# Altium PCB Aptomat_Radio.PcbDoc
Units mm, origin at the board's own origin, x right, y up, seen from the top; angles counter-clockwise.
Board outline 89 x 27 mm, 2 copper layers (Top Layer, Bottom Layer), stack 1.58 mm thick; 39 components, 53 nets, 147 pads, 465 vias.
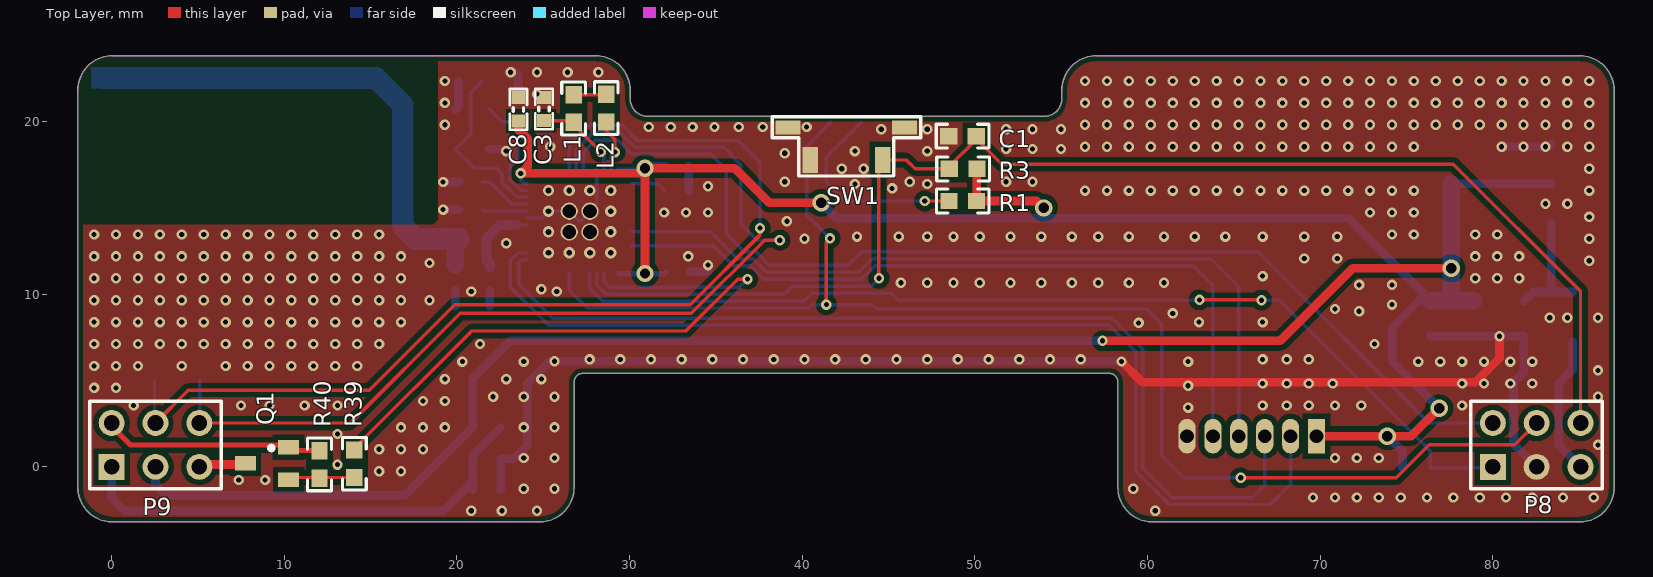
[diagram p0: Top Layer view]
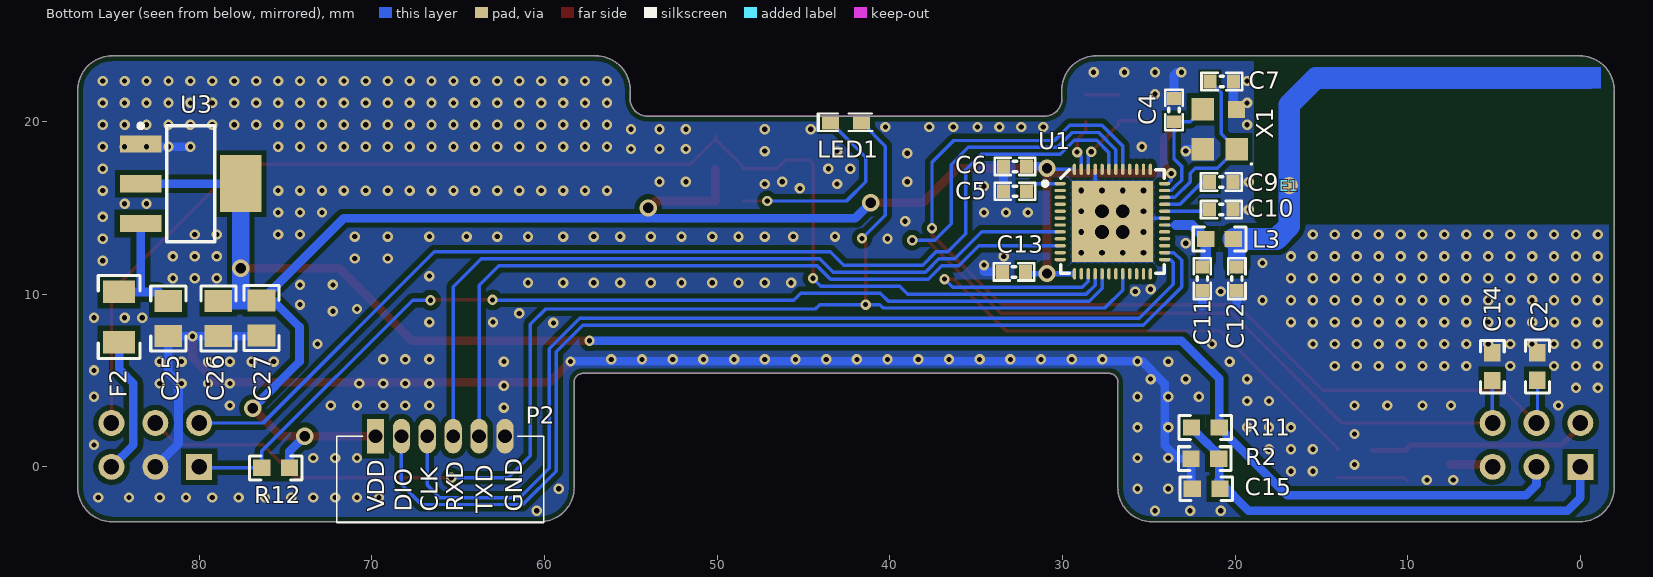
[diagram p1: Bottom Layer view, seen from below]

## Layer stack, top to bottom
Top Solder: solder mask 0.0102, Solder Resist, Dk 3.5
Top Layer: signal copper 0.0356
Dielectric 1: dielectric 1.5086, FR-4, Dk 4.8
Bottom Layer: signal copper 0.0356
Bottom Solder: solder mask 0.0102, Solder Resist, Dk 3.5

## Board outline
0.04,-3.19 cw(c0.04,-1.19) -1.96,-1.19 -1.96,21.81 cw(c0.04,21.81) 0.04,23.81 28.04,23.81 cw(c28.04,21.81) 30.04,21.81 30.04,21.31 ccw(c31.04,21.31) 31.04,20.31 54.04,20.31 ccw(c54.04,21.31) 55.04,21.31 55.04,21.81 cw(c57.04,21.81) 57.04,23.81 85.04,23.81 cw(c85.04,21.81) 87.04,21.81 87.04,-1.19 cw(c85.04,-1.19) 85.04,-3.19 60.29,-3.19 cw(c60.29,-1.19) 58.29,-1.19 58.29,4.91 ccw(c57.79,4.91) 57.79,5.41 27.29,5.41 ccw(c27.29,4.91) 26.79,4.91 26.79,-1.19 cw(c24.79,-1.19) 24.79,-3.19

## Design rules (kind name [scope] priority, off if disabled: settings)
Clearance polygon [IsRegion] p1: gap=0.3
Clearance [All] p2: gap=0.2
MinimumSolderMaskSliver [All] p1: minsoldermaskwidth=0.1
PolygonConnect [All] p1: connectstyle=Direct reliefconductorwidth=0.254 reliefentries=4 polygonreliefangle="90 Angle" airgapwidth=0.254
RoutingVias [All] p1: holewidth=0.3 width=0.6 viastyle="Through Hole" minholewidth=0.3 minwidth=0.6 maxholewidth=5 maxwidth=5
SilkToSilkClearance [All] p1: silktosilkclearance=0.1
SilkToSolderMaskClearance [IsPad] p1: minsilkscreentomaskgap=0.01 clearancetoexposedcopper=TRUE
SolderMaskExpansion [All] p1: expansion=0.102
Width [All] p1: maxlimit=5 minlimit=0.127 preferedwidth=0.254
27 further rules are at their usual default settings.

## Components (designator, comment, footprint, x,y, rotation, side; value= is the part's Value field where it differs from the comment)
C1 "221" 0603 49.29,19.151 r0 top
C2 "102" 0603 2.488,5.812 r270 bottom
C3 "1.0µF" CAPC1608X06L 25.045,20.728 r270 top
C4 "12pF" CAPC1608X06L 23.538,20.666 r90 bottom
C5 "100nF" CAPC1608X06L 32.746,15.966 r0 bottom
C6 "4.7µF" CAPC1608X06L 32.746,17.404 r0 bottom
C7 "12pF" CAPC1608X06L 20.771,22.325 r180 bottom
C8 "100nF" CAPC1608X06L 23.559,20.71 r90 top
C9 "100pF" CAPC1608X06L 20.8,16.5 r180 bottom
C10 "N.C." CAPC1608X06L 20.8,14.9 r180 bottom
C11 "0.8pF" CAPC1608X06L 21.9,10.9 r90 bottom
C12 "1.2pF" CAPC1608X06L 19.9,10.9 r270 bottom
C13 "100nF" CAPC1608X06L 32.807,11.295 r0 bottom
C14 "102" 0603 5.101,5.805 r270 bottom
C15 "104" 0603 21.679,-1.27 r180 bottom
C25 "105" 0805_HV 81.8,8.584 r90 bottom
C26 "105" 0805_HV 78.9,8.6 r90 bottom
C27 "105" 0805_HV 76.4,8.616 r90 bottom
E1 "Antenna" nrfant 16.863,16.287 r180 bottom locked
F2 "Res" 1206 84.646,8.68 r90 bottom
L1 "15nH" 0603 26.767,20.758 r90 top
L2 "10µH" 0603 28.649,20.782 r270 top
L3 "3.9nH" 0603 20.9,13.2 r180 bottom
LED1 "L0603G" LED_0603N 42.538,19.959 r180 bottom locked
P2 "Header 6" CON6P-ZH1.5 69.795,1.777 r180 bottom
P8 "Header 3X2" HDR2X3 80.01,0 r0 top locked
P9 "Header 3X2" HDR2X3 0,0 r0 top locked
Q1 "C1815" SOT23B 9,0.2 r270 top
R1 "220R" 0603 49.3,15.4 r0 top
R2 "2K" 0603 21.75,0.472 r0 bottom
R3 "100k" 0603 49.322,17.258 r0 top
R11 "2K" 0603 21.721,2.281 r0 bottom
R12 "100k" 0603 75.581,-0.06 r180 bottom
R39 "1K" 0603 14.057,0.181 r90 top
R40 "10K" 0603 12.039,0.138 r90 top
SW1 "PB SW" TL3330AF260QG 42.627,18.637 r180 top locked
U1 "nRF52832-QFAA" QFN40P600X600X90-48N 27.106,14.209 r180 bottom locked
U3 "AMS1117-3.3V SOT223 _MH" SOT223 80.5,16.4 r270 bottom
X1 "CX3225SB32000D0FFFCC" SON230P260X60-4N 20.901,19.556 r0 bottom

## Footprints (in the part's own frame and the unit in brackets; to place one, negate y for a bottom-side part, rotate by r counter-clockwise, add the part's x,y. Pads: shape width x height; smd on the part's side, far side on the other; paste and mask are expansions set on the pad)
0603 [mm] "0603 from SM-752 data"
  rect 1x0.95 smd: 1(-0.8,0) 2(0.8,0)
  silkscreen extent -1.52,-0.69 1.52,0.69, body extent -0.87,-0.47 0.87,0.47, height 1
0805_HV [mil] "0805 with 30mil clearance between pads"
  rect 50x63 smd: 1(-40,0) 2(40,0)
  silkscreen extent -74,-40 74,40, body extent -43,-29 43,29, height 57
1206 [mm] "1206 from SM-752 data"
  rect 1.3x1.85 smd: 1(1.45,0) 2(-1.45,0)
  silkscreen extent -2.4,-1.21 2.4,1.21, body extent -1.7,-0.9 1.7,0.9, height 1.35
CAPC1608X06L [mm]
  rect 0.75x0.8 smd: 1(-0.675,0) 2(0.675,0)
  silkscreen extent -1.17,-0.5 1.17,0.5, body extent -0.8,-0.43 0.8,0.43, height 0.8
CON6P-ZH1.5 [mm] "CON6"
  rect 1x2 hole 0.8 paste+0: 1(0,0)
  oval 1x2 hole 0.8 paste+0: 2(1.5,0) 3(3,0) 4(4.5,0) 5(6,0) 6(7.5,0)
  silkscreen extent -2.25,-5 9.75,0
HDR2X3 [mm] "Connector; Header; 3x2 Position"
  rect 1.5x1.5 hole 0.9: 1(0,0)
  round 1.5 hole 0.9: 2(0,2.54) 3(2.54,0) 4(2.54,2.54) 5(5.08,0) 6(5.08,2.54)
  silkscreen extent -1.27,-1.27 6.35,3.81
LED_0603N [mm] "SMD Super Bright LED, GREEN"
  rect 1x0.813 smd: 1(0.9,0) 2(-0.9,0)
  silkscreen extent -1.65,-0.53 1.52,0.51, body extent -0.78,-0.31 0.82,0.89, height 0.3
nrfant [mm]
  round 1 smd: 1(0,0)
  Top Layer region: 17.286,5.617 17.286,6.887 18.048,6.887 18.048,5.617
  Top Layer lines w1.27: 17.401,6.248 1.559,6.248 ; 0,0 0,4.689 ; 1.559,6.248 1.559,6.248 ; 1.559,6.248 0,4.689 ; 0,4.689 0,4.689
QFN40P600X600X90-48N [mm]
  oval 0.65x0.2 smd: 1(-3.025,2.2) 2(-3.025,1.8) 3(-3.025,1.4) 4(-3.025,1) 5(-3.025,0.6) 6(-3.025,0.2) 7(-3.025,-0.2) 8(-3.025,-0.6) 9(-3.025,-1) 10(-3.025,-1.4) 11(-3.025,-1.8) 12(-3.025,-2.2) 25(3.025,-2.2) 26(3.025,-1.8) 27(3.025,-1.4) 28(3.025,-1) 29(3.025,-0.6) 30(3.025,-0.2) 31(3.025,0.2) 32(3.025,0.6) 33(3.025,1) 34(3.025,1.4) 35(3.025,1.8) 36(3.025,2.2)
  oval 0.2x0.65 smd: 13(-2.2,-3.025) 14(-1.8,-3.025) 15(-1.4,-3.025) 16(-1,-3.025) 17(-0.6,-3.025) 18(-0.2,-3.025) 19(0.2,-3.025) 20(0.6,-3.025) 21(1,-3.025) 22(1.4,-3.025) 23(1.8,-3.025) 24(2.2,-3.025) 37(2.2,3.025) 38(1.8,3.025) 39(1.4,3.025) 40(1,3.025) 41(0.6,3.025) 42(0.2,3.025) 43(-0.2,3.025) 44(-0.6,3.025) 45(-1,3.025) 46(-1.4,3.025) 47(-1.8,3.025) 48(-2.2,3.025)
  rect 4.7x4.7 smd: 49(0,0)
  silkscreen extent -4.03,-3 3,3, body extent -3.02,-3.02 3.02,3.02, height 0.86
SON230P260X60-4N [mm] "SON, 4-Leads, Body 3.25x2.55mm, Pitch 2.30mm, IPC Medium Density"
  rect 1.3x1.3 smd: 1(-0.985,1.15) 3(0.985,-1.15) 4(0.985,1.15)
  rect 1x1 smd: 2(-0.985,-1.15)
  silkscreen extent -1.9,1.96 -1.8,2.06, body extent -1.3,-1.65 1.3,1.65, height 0.6
SOT23B [mm] "SOT 23B"
  rect 0.85x1.2 smd: 1(0.95,1.25) 2(0,-1.25) 3(-0.94,1.245)
  silkscreen extent -1.02,0.13 -0.77,0.38, body extent -1.5,-1.2 1.5,1.3, height 1.06
SOT223 [mm]
  rect 1x2.4 smd: 1(-2.3,-2.9) 2(0,-2.9) 3(2.3,-2.9)
  rect 3.3x2.4 smd: 4(0,2.9)
  silkscreen extent -3.47,-3.03 3.35,1.4, body extent -3.25,-3.56 3.25,3.4, height 1.68
TL3330AF260QG [mm]
  rect 1.45x0.8 smd: 1(-3.302,-1.016) 1(3.444,-1.016)
  rect 0.9x1.5 smd: 1(2.167,0.864) 2(-2.035,0.864)
  silkscreen extent -4.23,-1.65 4.37,1.79, body extent -3.83,-2.18 3.97,1.33, height 3.41

## Part data
C1 C2 C14 C15 C25 C26 C27: library part CM, "Cap SMD"
C3: library part C0603-1µ0, "Capacitor, X7R, ±10%"
C4 C7: library part C0402-12p, "Capacitor, NP0, ±2%"
C5 C8 C13: library part C0402-100n, "Capacitor, X7R, ±10%"
C6: library part C0603-4µ7, "Capacitor, X5R, ±10%"
C9: library part C0402-100p, "Capacitor, NP0, ±5%"
C10: library part C0402-N.C., "Not mounted"
C11: library part C0402-0.8p, "Capacitor, NP0, ±5%"
C12: library part C0402-1.2p, "Capacitor, NP0, ±0.1pF"
E1: "Generic Antenna"
F2: library part Res-SMD, "Resistor"
L1: library part L0402-15n, "Inductor, 320mA, ±5%"
L2: library part L0603-10µ, "Inductor, 80mA, ±10%"
L3: library part L0402-3n9, "Inductor, 170mA, ±0.1nH"
LED1: library part "LG L29K Smartled Green", "LED SMARTLED GREEN 570NM 0603"
P2: "Header, 6-Pin"
P8 P9: "Header, 3-Pin, Dual row"
Q1: "NPN 600mW, ECB"
R1: library part R0402-220, "Resistor, ±1%, 0.063W"
R2 R11 R39 R40: library part R, "Resistor 1/4W"
R3 R12: library part R0402-100k, "Resistor, ±1%, 0.063W"
SW1: library part Switch-PB-6.2x6.3mm-SMD, "Tactile Switch, SPNO, SMD, 160gf, 6.2x6.3x2.5mm"
U1: "Multi-protocol Bluetooth Low Energy and 2.4GHz proprietary system-on-chip"
X1: library part XTAL_SMD2016_32MHz_8pF_Epson, "XTAL SMD 2016, 32MHz, Cl=8pF, Tol: ±10ppm, Stab: ±10ppm"

## Free pads (board coordinates)
  round 1 hole 0.8 paste+0: 2(26.506,14.809) 3(27.706,14.809) 4(26.506,13.609) 5(27.706,13.609)

## Via types
v1: diameter 0.6, hole 0.3, Top Layer to Bottom Layer, tented both sides, 442 vias
v2: diameter 0.66, hole 0.33, Top Layer to Bottom Layer, tented both sides, 16 vias
v3: diameter 1, hole 0.6, Top Layer to Bottom Layer, tented both sides, 7 vias

## Nets (pads, with @x,y where several pads share a name; then routed paths per layer and width w, separated by ;. In a path a pad name is that pad's centre, name@x,y a point inside that pad or via, vN(x,y) a via of type N, cw(c..) or ccw(c..) an arc to the next point about the centre after c; other vN are vias at no path point)
ANT: C12.1 E1.1 L3.2 | length 7.4
  Bottom Layer w1: C12.1@19.9,11.7 L3.2@19.9,13
  Bottom Layer w1.27: E1.1 16.863,13.937 17.6,13.2 19.7,13.2 19.9,13 L3.2
BUTTON1: C1.2 P8.6 R3.1 SW1.2 U1.16 | length 77.4
  Top Layer w0.2: v1(44.45,10.922) 44.45,17.563 SW1.2 46.026,17.774 46.542,17.258 R3.1 48.522,17.407 49.986,18.871 C1.2@50.09,18.871 ; C1.2 50.09,18.998 51.562,17.526 77.724,17.526 85.09,10.16 P8.6
  Bottom Layer w0.2: U1.16 28.106,10.529 28.635,10 38.956,10 39.423,10.467 43.995,10.467 v1(44.45,10.922)
CURRENT_SIGNAL1: C14.2 P9.6 U1.42 | length 58.4
  Top Layer w0.2: P9.6 13.836,2.54 20.186,8.89 33.586,8.89 37.826,13.13 v1(38.702,13.13)
  Bottom Layer w0.2: P9.6 5.101,2.561 C14.2 ; U1.42 26.906,18.367 27.907,19.368 29.43,19.368 30.294,18.504 35.448,18.504 36.447,17.505 36.447,14.092 37.409,13.13 v1(38.702,13.13)
CURRENT_SIGNAL2: C2.2 P9.4 U1.41 | length 60
  Top Layer w0.2: P9.4 4.445,4.445 14.923,4.445 19.876,9.398 33.528,9.398 37.559,13.429 v1(37.559,13.829)
  Bottom Layer w0.2: C2.2@2.482,5.024 2.482,2.598 P9.4 ; U1.41 26.506,18.588 27.711,19.792 29.572,19.792 30.46,18.904 36.292,18.904 37.559,17.637 v1(37.559,13.829)
CURRENT_SIGNAL3: U1.40
DEC1: C5.1 U1.1 | length 2.1
  Bottom Layer w0.2: U1.1 31.628,16.409 C5.1
DEC2: C10.1 U1.32 | length 2.6
  Bottom Layer w0.2: C10.1 21.566,14.809 U1.32
DEC3: C9.1 U1.33 | length 3.1
  Bottom Layer w0.2: C9.1 21.9,16.5 23.191,15.209 U1.33
DEC4: C3.2 L1.1 U1.46 | length 5.2
  Top Layer w0.2: C3.2 26.672,20.053 L1.1 26.767,19.817 v1(28.332,18.252)
  Bottom Layer w0.2: v1(28.332,18.252) 28.506,18.078 U1.46
GND: C1.1 C2.1 C3.1 C4.2 C5.2 C6.2 C7.2 C8.2 C9.2 C10.2 C11.1 C12.2 C13.2 C14.1 C15.1 C25.1 C26.1 C27.1 P2.6 P8.3 pad.2 pad.3 pad.4 pad.5 R2.2 SW1.1 U1.31 U1.45 U1.49 U3.1 X1.2 X1.4 | length 101.4
  Top Layer w0.5: v1(58.5,6.1) 59.7,4.9 68.072,4.9 79,4.9 80.4,6.3 v1(80.4,7.568)
  Bottom Layer w0.2: U1.31 24.906,14.409 v2(25.306,14.809) v2(26.506,14.809) U1.49 v2(27.706,14.809) 28.106,15.209 U1.45
  Bottom Layer w0.5: v1(19.2,14.9) C10.2 ; v1(19.2,16.5) C9.2 ; 19.9,9.3 C12.2 ; X1.2 20.096,20.886 C7.2 ; X1.4 22.894,18.406 22.775,18.288 v1(22.86,18.288) ; 21.9,9.3 C11.1 ; C15.1@22.524,-1.313 22.55,-1.287 R2.2 23.291,0.472 24.085,1.266 24.085,4.818 25.382,6.115 v1(25.654,6.115) 31.242,6.115 40.132,6.115 45.466,6.115 50.8,6.115 54.356,6.115 v1@58.5,6.115 ; v1(23.114,22.86) 23.368,22.86 23.538,22.69 C4.2 ; C5.2 33.421,16.679 33.4,16.7 33.421,16.721 C6.2 ; C13.2 34.495,11.295 34.544,11.344 v1(34.544,11.684) ; C27.1 76.432,7.568 v1(80.4,7.568) C25.1 81.8,5.473 81.21,4.883 81.21,1.34 P8.3 ; v1(80.518,18.542) v1(81.788,18.542) v1(83.058,18.542) 83.242,18.542 U3.1
  other v1: 20.828,-2.54 22.606,-2.54 24.638,-2.54 60.452,-2.54 69.596,-1.778 70.866,-1.778 72.136,-1.778 73.406,-1.778 74.676,-1.778 76.2,-1.778 77.724,-1.778 79.248,-1.778 80.772,-1.778 82.296,-1.778 84.074,-1.778 85.852,-1.778 23.876,-1.27 25.654,-1.27 59.182,-1.27 7.366,-0.762 8.89,-0.762 15.494,-0.254 16.764,-0.254 13.081,0.127 23.876,0.508 25.654,0.508 70.866,0.508 72.136,0.508 73.406,0.508 15.494,1.016 16.764,1.016 18.034,1.016 86.106,1.27 13.081,1.905 16.764,2.286 18.034,2.286 19.304,2.286 23.876,2.286 25.654,2.286 62.357,3.429 1.27,3.556 7.493,3.556 9.144,3.556 11.176,3.556 13.081,3.556 66.675,3.556 68.072,3.556 69.342,3.556 70.866,3.556 72.39,3.556 78.232,3.556 18.034,3.81 19.304,3.81 22.098,4.064 23.876,4.064 25.654,4.064 86.106,4.064 -1.016,4.572 0.254,4.572 62.357,4.699 66.675,4.826 68.072,4.826 69.342,4.826 70.739,4.826 78.232,4.826 79.502,4.826 81.026,4.826 82.296,4.826 19.304,5.08 22.86,5.08 24.892,5.08 86.106,5.588 -1.016,5.842 0.254,5.842 1.524,5.842 4.064,5.842 6.604,5.842 7.874,5.842 9.144,5.842 10.414,5.842 11.684,5.842 12.954,5.842 14.224,5.842 20.32,6.096 23.876,6.096 62.357,6.096 75.692,6.096 76.962,6.096 78.232,6.096 79.502,6.096 81.026,6.096 82.296,6.096 27.686,6.223 29.464,6.223 31.242,6.223 33.02,6.223 34.798,6.223 36.576,6.223 38.354,6.223 40.132,6.223 41.91,6.223 43.688,6.223 45.466,6.223 47.244,6.223 49.022,6.223 50.8,6.223 52.578,6.223 54.356,6.223 56.134,6.223 66.675,6.223 68.072,6.223 69.342,6.223 -1.016,7.112 0.254,7.112 1.524,7.112 2.794,7.112 4.064,7.112 5.334,7.112 6.604,7.112 7.874,7.112 9.144,7.112 10.414,7.112 11.684,7.112 12.954,7.112 14.224,7.112 15.494,7.112 21.336,7.112 73.152,7.112 59.489,8.337 -1.016,8.382 0.254,8.382 1.524,8.382 2.794,8.382 4.064,8.382 5.334,8.382 6.604,8.382 7.874,8.382 9.144,8.382 10.414,8.382 11.684,8.382 12.954,8.382 14.224,8.382 15.494,8.382 16.764,8.382 62.992,8.382 66.675,8.382 83.312,8.636 84.328,8.636 86.106,8.636 61.468,8.89 72.263,9.017 70.866,9.144 74.168,9.398 -1.016,9.652 0.254,9.652 1.524,9.652 2.794,9.652 4.064,9.652 5.334,9.652 6.604,9.652 7.874,9.652 9.144,9.652 10.414,9.652 11.684,9.652 12.954,9.652 14.224,9.652 15.494,9.652 16.764,9.652 18.415,9.652 20.828,10.16 25.781,10.16 24.892,10.287 72.263,10.541 74.168,10.541 45.72,10.668 47.244,10.668 48.768,10.668 50.292,10.668 52.07,10.668 53.848,10.668 55.626,10.668 57.15,10.668 58.928,10.668 60.96,10.668 -1.016,10.922 0.254,10.922 1.524,10.922 2.794,10.922 4.064,10.922 5.334,10.922 6.604,10.922 7.874,10.922 9.144,10.922 10.414,10.922 11.684,10.922 12.954,10.922 14.224,10.922 15.494,10.922 16.764,10.922 78.994,10.922 80.264,10.922 81.534,10.922 66.675,11.049 18.415,11.811 85.598,11.938 69.088,12.065 70.993,12.065 -1.016,12.192 0.254,12.192 1.524,12.192 2.794,12.192 4.064,12.192 5.334,12.192 6.604,12.192 7.874,12.192 9.144,12.192 10.414,12.192 11.684,12.192 12.954,12.192 14.224,12.192 15.494,12.192 16.764,12.192 33.401,12.192 78.994,12.192 80.264,12.192 81.534,12.192 22.86,12.954 40.132,13.208 85.598,13.208 43.18,13.335 45.593,13.335 47.244,13.335 48.768,13.335 50.292,13.335 52.07,13.335 53.848,13.335 55.626,13.335 57.15,13.335 58.928,13.335 60.96,13.335 62.738,13.335 64.516,13.335 66.675,13.335 69.088,13.335 70.993,13.335 -1.016,13.462 0.254,13.462 1.524,13.462 2.794,13.462 4.064,13.462 5.334,13.462 6.604,13.462 7.874,13.462 9.144,13.462 10.414,13.462 11.684,13.462 12.954,13.462 14.224,13.462 15.494,13.462 74.168,13.462 75.438,13.462 78.994,13.462 80.264,13.462 39.116,14.224 85.598,14.478 32.004,14.732 33.274,14.732 34.544,14.732 72.898,14.732 74.168,14.732 75.438,14.732 83.058,15.24 84.328,15.24 56.388,16.002 57.658,16.002 58.928,16.002 60.198,16.002 61.468,16.002 62.738,16.002 64.008,16.002 65.278,16.002 66.548,16.002 67.818,16.002 69.088,16.002 70.358,16.002 71.628,16.002 72.898,16.002 74.168,16.002 75.438,16.002 85.598,16.002 45.212,16.129 34.544,16.256 43.053,16.383 47.244,16.383 38.989,16.51 46.228,16.51 51.816,16.51 53.34,16.51 42.291,17.272 43.561,17.272 85.598,17.272 38.989,18.161 43.053,18.288 47.244,18.288 51.816,18.415 53.34,18.415 54.991,18.415 25.4,18.542 56.388,18.542 57.658,18.542 58.928,18.542 60.198,18.542 61.468,18.542 62.738,18.542 64.008,18.542 65.278,18.542 66.548,18.542 67.818,18.542 69.088,18.542 70.358,18.542 71.628,18.542 72.898,18.542 74.168,18.542 75.438,18.542 84.328,18.542 85.598,18.542 44.577,19.558 47.244,19.558 51.816,19.558 53.34,19.558 54.991,19.558 31.115,19.685 32.385,19.685 33.655,19.685 34.925,19.685 36.322,19.685 37.719,19.685 40.259,19.685 19.304,19.812 56.388,19.812 57.658,19.812 58.928,19.812 60.198,19.812 61.468,19.812 62.738,19.812 64.008,19.812 65.278,19.812 66.548,19.812 67.818,19.812 69.088,19.812 70.358,19.812 71.628,19.812 72.898,19.812 74.168,19.812 75.438,19.812 76.708,19.812 77.978,19.812 79.248,19.812 80.518,19.812 81.788,19.812 83.058,19.812 84.328,19.812 85.598,19.812 19.304,21.082 56.388,21.082 57.658,21.082 58.928,21.082 60.198,21.082 61.468,21.082 62.738,21.082 64.008,21.082 65.278,21.082 66.548,21.082 67.818,21.082 69.088,21.082 70.358,21.082 71.628,21.082 72.898,21.082 74.168,21.082 75.438,21.082 76.708,21.082 77.978,21.082 79.248,21.082 80.518,21.082 81.788,21.082 83.058,21.082 84.328,21.082 85.598,21.082 24.638,21.59 19.304,22.352 56.388,22.352 57.658,22.352 58.928,22.352 60.198,22.352 61.468,22.352 62.738,22.352 64.008,22.352 65.278,22.352 66.548,22.352 67.818,22.352 69.088,22.352 70.358,22.352 71.628,22.352 72.898,22.352 74.168,22.352 75.438,22.352 76.708,22.352 77.978,22.352 79.248,22.352 80.518,22.352 81.788,22.352 83.058,22.352 84.328,22.352 85.598,22.352 24.638,22.86 26.416,22.86 28.194,22.86
  other v2: 25.306,12.409 26.506,12.409 27.706,12.409 28.906,12.409 25.306,13.609 26.506,13.609 27.706,13.609 28.906,13.609 28.906,14.809 25.306,16.009 26.506,16.009 27.706,16.009 28.906,16.009
GND_RL: P9.2 Q1.3 R40.2 | length 12.8
  Top Layer w0.3: P9.2 0,2.36 1.098,1.261 9.833,1.261 10.157,0.938 R40.2
  Bottom Layer w0.3: P9.2@0,2.529 P9.2
LED1: LED1.1 P8.4 U1.20 | length 79.2
  Top Layer w0.2: v1(41.402,9.398) 41.402,13.018 v1@41.607,13.223 ; v1(65.405,-0.635) 74.422,-0.635 76.327,1.27 81.28,1.27 P8.4
  Bottom Layer w0.2: U1.20 26.506,10.236 27.542,9.2 40.386,9.2 40.584,9.398 v1(41.402,9.398) 44.069,9.398 44.323,9.144 59.944,9.144 60.833,8.255 60.833,0.635 62.103,-0.635 v1(65.405,-0.635) ; v1(41.61,13.235) 40.259,14.586 40.259,18.58 LED1.1
NetC11_2: C11.2 L3.1 U1.30 | length 4.4
  Bottom Layer w0.2: 23.4,14.009 U1.30
  Bottom Layer w0.6: C11.2 21.9,11.8 21.7,12 L3.1 22.509,14.009 23.4,14.009
NetC25_2: C25.2 F2.1 U3.3 | length 7
  Bottom Layer w0.5: C25.2 82.33,10.13 83.4,10.13 ; U3.3 83.4,10.13 ; F2.1 83.4,10.13
NetL1_2: L1.2 L2.1 | length 1.9
  Top Layer w0.2: L1.2 28.625,21.558 L2.1
NetL2_2: L2.2 U1.47 | length 3.1
  Top Layer w0.2: L2.2 28.649,19.474 29.151,18.972 v1(29.151,18.233)
  Bottom Layer w0.2: U1.47 28.906,17.977 29.151,18.222 v1(29.151,18.233)
NetLED1_2: LED1.2 R1.1 | length 11.8
  Top Layer w0.2: v1(47.1,15.4) R1.1
  Bottom Layer w0.2: LED1.2 41.402,17.923 41.402,16.51 42.512,15.4 v1(47.1,15.4)
NetQ1_1: Q1.1 R39.1 R40.1 | length 4.1
  Top Layer w0.2: Q1.1@10.024,-0.814 10.219,-0.619 R39.1
P0.00: U1.2
P0.01: U1.3
P0.02: U1.4
P0.03: U1.5
P0.04: U1.6
P0.05: U1.7
P0.06: P2.4 U1.8 | length 45.8
  Bottom Layer w0.2: U1.8 34.672,13.609 36.233,12.048 37.17,12.048 37.934,11.284 43.288,11.284 44.052,12.048 63.675,12.048 65.295,10.428 P2.4
P0.07: U1.9
P0.08: P2.5 U1.10 | length 44
  Bottom Layer w0.2: U1.10 34.841,12.809 36.002,11.648 37.005,11.648 37.786,10.867 43.437,10.867 44.218,11.648 62.66,11.648 63.795,10.513 P2.5
P0.09/NFC1: U1.11
P0.10/NFC2: U1.12
P0.11: U1.14
P0.12: R39.2 U1.15 | length 36
  Top Layer w0.2: R39.2 14.057,1.065 20.86,7.868 33.268,7.868 36.274,10.874 v1(36.836,10.874)
  Bottom Layer w0.2: U1.15 28.506,10.753 28.859,10.4 36.347,10.4 36.822,10.874 v1(36.836,10.874)
P0.14: P8.1 R12.1 U1.17 | length 58.4
  Top Layer w0.2: v1(63.014,9.672) 66.594,9.672 v1(66.611,9.655)
  Bottom Layer w0.2: U1.17 27.706,10.354 28.461,9.6 40.08,9.6 40.547,10.067 45.166,10.067 45.574,9.659 63.001,9.659 v1(63.014,9.672) ; v1(66.611,9.655) 67.645,9.655 76.381,0.919 R12.1 79.95,-0.06 P8.1
P0.15: U1.18
P0.16: U1.19
P0.18: U1.21
P0.19: U1.22
P0.20: U1.23
P0.21: U1.24
P0.22: U1.27
P0.23: U1.28
P0.24: U1.29
P0.25: U1.37
P0.26: U1.38
P0.27: U1.39
P0.31: P8.2 U1.43 | length 63.6
  Bottom Layer w0.2: U1.43 27.306,18.202 28.021,18.916 29.316,18.916 30.129,18.104 34.701,18.104 35.596,17.209 35.596,13.501 36.641,12.456 37.338,12.456 37.338,12.446 38.1,11.684 42.672,11.684 43.444,12.456 66.396,12.456 76.312,2.54 P8.2
RL1: P9.5 Q1.2 | length 2.5
  Top Layer w0.5: P9.5 5.216,0.136 Q1.2@7.524,0.136
  Bottom Layer w0.3: P9.5 P9.5@5.11,-0.03
SWDCLK: P2.3 U1.25 | length 57.3
  Bottom Layer w0.2: U1.25 23.762,12.009 23.589,11.835 23.589,10.573 25.547,8.614 57.952,8.614 59.736,6.829 59.736,-0.08 61.438,-1.781 66.064,-1.781 66.795,-1.05 P2.3
SWDIO: P2.2 U1.26 | length 60.4
  Bottom Layer w0.2: U1.26 23.547,12.409 23.101,11.962 23.101,10.419 25.319,8.2 57.8,8.2 59.336,6.664 59.336,-0.245 61.272,-2.181 67.133,-2.181 68.295,-1.018 P2.2
VCC_RELAY: F2.2 P8.5 | length 8.1
  Bottom Layer w0.5: F2.2 84.646,5.652 83.82,4.826 83.82,1.27 P8.5
VDD_NRF: C6.1 C8.1 C13.1 C26.2 C27.2 P2.1 P9.3 R1.2 R3.2 R11.1 R12.2 U1.13 U1.36 U1.48 U3.2 U3.4 | length 198.3
  Top Layer w0.5: C8.1 23.559,19.541 24.1,19 24.1,17.4 v1(23.7,17) 30.6,17 v3(30.9,17.3) ; v3(30.9,11.2) v3(30.9,17.3) ; v3(41.1,15.3) 38.1,15.3 36.1,17.3 v3(30.9,17.3) ; R3.2 50.122,15.422 R1.2 53.6,15.4 v3(54,15) ; v1(57.4,7.3) 67.7,7.3 71.9,11.5 v3(77.6,11.5) ; P2.1 v3(73.9,1.777) 75.277,1.777 v3(76.9,3.4)
  Bottom Layer w0.2: v1(23.7,17) 23.7,16.6 23.891,16.409 U1.36 ; U1.48 30.834,17.234 v3(30.9,17.3)
  Bottom Layer w0.3: 29.409,11.184 32.02,11.184 C13.1
  Bottom Layer w0.5: P9.3 2.54,-1.04 3.152,-1.652 16.988,-1.652 R11.1 20.921,5.121 23.1,7.3 v1(57.4,7.3) ; v3(30.9,17.3) 31.004,17.404 C6.1 ; v3(41.1,15.3) 42,14.4 54.1,14.4 ; v3(54,15) 54,14.5 54.1,14.4 ; v3(73.9,1.777) 74.781,0.896 R12.2 ; C27.2 C27.2@76.073,9.632 ; C27.2@76.4,9.732 C27.2@76.3,9.732 ; v3(76.9,3.4) 74.2,6.1 74.2,8.1 75.732,9.632 C27.2@76.073,9.632 ; U3.4 U3.2 ; 77.7,9.632 78.884,9.632 C26.2 ; 54.1,14.4 71.632,14.4 C27.2@76.3,9.732 ; C27.2@76.073,9.632 76.173,9.732 C27.2@76.3,9.732
  Bottom Layer w1: U3.4 77.6,9.732 77.5,9.632 C27.2 76.416,9.616 C26.2
VREF: C15.2 P9.1 R2.1 R11.2 | length 28.1
  Bottom Layer w0.5: P9.1 0,-1.8 0.743,-2.543 19.22,-2.543 C15.2@20.924,-0.838 ; C15.2@20.924,-1.313 C15.2@20.924,-0.838 ; 20.972,-0.791 C15.2@20.924,-0.838 ; R11.2 22.521,2.269 21.608,1.356 21.596,1.356 20.95,0.71 R2.1 20.924,0.446 C15.2@20.924,-0.838
XC1: C7.1 U1.34 X1.1 | length 10.2
  Bottom Layer w0.2: C7.1 20.8,21.679 20.8,19.29 X1.1 21.023,17.3 22.3,17.3 22.6,17 22.6,16.5 23.491,15.609 U1.34
XC2: C4.1 U1.35 X1.3 | length 6.7
  Bottom Layer w0.2: X1.3 22.602,19.991 C4.1 23.538,17.838 23.1,17.4 23.1,16.6 23.456,16.244 ; 23.456,16.243 23.69,16.009 U1.35
pads on no net: U1.44

## Polygon pours and split planes (outlines as drawn)
GND on Bottom Layer "Bottom Layer-No Net" (solid, remove dead copper, pour order 4): 16.221,14.028 -1.939,14.028 -1.924,14.014 -1.924,-1.358 -1.91,-1.372 -1.91,-1.554 -1.479,-2.372 -0.979,-2.872 -0.302,-3.162 0.061,-3.162 0.076,-3.147 25.007,-3.147 25.022,-3.133 25.203,-3.133 25.936,-2.872 26.421,-2.272 26.811,-1.525 26.811,-0.872 26.826,-0.857 26.826,5.036 26.84,5.05 26.84,5.133 26.951,5.244 26.951,5.299 27.1,5.448 27.311,5.448 27.321,5.438 57.811,5.438 57.826,5.424 57.909,5.424 57.923,5.409 58.006,5.409 58.117,5.299 58.172,5.299 58.311,5.159 58.311,4.938 58.311,-1.525 58.34,-1.554 58.34,-1.898 58.547,-2.105 59.518,-3.076 59.731,-3.076 59.817,-3.162 67.921,-3.162 67.936,-3.147 85.257,-3.147 86.021,-2.872 86.421,-2.572 86.821,-2.072 87.061,-1.344 87.061,-0.672 87.032,-0.643 87.032,22.23 86.721,22.928 86.122,23.527 85.434,23.828 85.257,23.828 56.865,23.824 56.221,23.628 55.421,22.928 55.052,22.01 55.052,21.838 55.061,21.828 55.061,21.338 55.048,21.325 55.048,21.208 55.035,21.195 55.035,21.077 54.935,20.976 54.935,20.834 54.566,20.465 54.439,20.338 53.521,20.338 30.683,20.338 30.557,20.465 30.047,20.975 30.047,22.034 30.047,22.478 29.918,22.607 28.773,23.752 28.642,23.752 19.145,23.752 19.121,23.728 18.921,23.728 18.921,14.328 18.621,14.028
GND on Top Layer "Bottom Layer-No Net" (solid, remove dead copper, pour order 3): 16.217,14.019 -1.943,14.019 -1.929,14.004 -1.929,-1.367 -1.914,-1.382 -1.914,-1.563 -1.483,-2.381 -0.983,-2.881 -0.307,-3.171 0.057,-3.171 0.071,-3.157 25.003,-3.157 25.017,-3.142 25.199,-3.142 25.931,-2.881 26.417,-2.281 26.807,-1.534 26.807,-0.881 26.821,-0.867 26.821,5.026 26.836,5.041 26.836,5.124 26.946,5.234 26.946,5.289 27.095,5.439 27.307,5.439 27.316,5.429 57.807,5.429 57.821,5.414 57.904,5.414 57.919,5.4 58.002,5.4 58.112,5.289 58.167,5.289 58.307,5.15 58.307,4.929 58.307,-1.534 58.336,-1.563 58.336,-1.907 58.543,-2.114 59.514,-3.085 59.726,-3.085 59.812,-3.171 67.917,-3.171 67.931,-3.157 85.253,-3.157 86.017,-2.881 86.417,-2.581 86.817,-2.081 87.057,-1.353 87.057,-0.681 87.028,-0.652 87.028,22.221 86.717,22.919 86.117,23.518 85.429,23.819 85.253,23.819 56.861,23.814 56.217,23.619 55.417,22.919 55.047,22.001 55.047,21.829 55.057,21.819 55.057,21.329 55.044,21.316 55.044,21.198 55.031,21.185 55.031,21.068 54.93,20.967 54.93,20.824 54.561,20.455 54.434,20.329 53.517,20.329 30.679,20.329 30.552,20.455 30.042,20.965 30.042,22.025 30.042,22.469 29.913,22.598 28.769,23.743 28.637,23.743 19.141,23.743 19.117,23.719 18.917,23.719 18.917,14.319 18.617,14.019

## Keep-outs
Keep-Out Layer:
  the board outline again, w0.013

## Silkscreen, mask and mechanical layers (free items; w line width, h text height)
Bottom Overlay:
  text "GND" at 61.3,-2.6 h1 r270
  text "RXD" at 64.7,-2.6 h1 r270
  text "CLK" at 66.2,-2.6 h1 r270
  text "DIO" at 67.7,-2.6 h1 r270
  text "VDD" at 69.3,-2.6 h1 r270
  text "TXD" at 63,-2.7 h1 r270
Mechanical 1:
  circle w0.013: c62.445,50.276 r0.375
  circle w0.013: c42.445,50.276 r0.375
  circle w0.013: c22.445,50.276 r0.375
  circle w0.013: c62.445,47.526 r0.375
  circle w0.013: c42.445,47.526 r0.375
  circle w0.013: c22.445,47.526 r0.375
  circle w0.013: c84.985,33.081 r0.45
  circle w0.013: c-0.095,33.081 r0.45
  circle w0.013: c4.985,33.081 r0.45
  circle w0.013: c2.445,33.081 r0.45
  circle w0.013: c79.905,33.081 r0.45
  circle w0.013: c82.445,33.081 r0.45
  circle w0.013: c79.905,30.541 r0.45
  circle w0.013: c82.445,30.541 r0.45
  circle w0.013: c4.985,30.541 r0.45
  circle w0.013: c2.445,30.541 r0.45
  circle w0.013: c-0.095,30.541 r0.45
  circle w0.013: c84.985,30.541 r0.45
  lines w0.013: -2.055,34.351 86.945,34.351 ; -2.055,36.001 86.945,36.001 ; 6.444,27.443 6.444,30.639 ; 20.175,47.751 19.822,47.751 ; 20.175,48.351 19.822,48.351 ; 20.175,49.451 19.822,49.451 ; 20.175,50.051 19.822,50.051 ; 24.715,47.751 25.068,47.751 ; 24.715,48.351 25.068,48.351 ; 24.715,49.451 25.068,49.451 ; 24.715,50.051 25.068,50.051 ; 40.175,47.751 39.822,47.751 ; 40.175,48.351 39.822,48.351 ; 40.175,49.451 39.822,49.451 ; 40.175,50.051 39.822,50.051 ; 44.715,47.751 45.068,47.751 ; 44.715,48.351 45.068,48.351 ; 44.715,49.451 45.068,49.451 ; 44.715,50.051 45.068,50.051 ; 60.175,47.751 59.822,47.751 ; 60.175,48.351 59.822,48.351 ; 60.175,49.451 59.822,49.451 ; 60.175,50.051 59.822,50.051 ; 64.715,47.751 65.068,47.751 ; 64.715,48.351 65.068,48.351 ; 64.715,49.451 65.068,49.451 ; 64.715,50.051 65.068,50.051 ; 19.822,47.751 19.692,47.751 19.692,48.351 19.822,48.351 ; 19.822,47.751 19.822,48.351 ; 19.822,49.451 19.692,49.451 19.692,50.051 19.822,50.051 ; 19.822,49.451 19.822,50.051 ; 25.068,47.751 25.198,47.751 25.198,48.351 25.068,48.351 ; 25.068,47.751 25.068,48.351 ; 25.068,49.451 25.198,49.451 25.198,50.051 25.068,50.051 ; 25.068,49.451 25.068,50.051 ; 39.822,47.751 39.692,47.751 39.692,48.351 39.822,48.351 ; 39.822,47.751 39.822,48.351 ; 39.822,49.451 39.692,49.451 39.692,50.051 39.822,50.051 ; 39.822,49.451 39.822,50.051 ; 45.068,47.751 45.198,47.751 45.198,48.351 45.068,48.351 ; 45.068,47.751 45.068,48.351 ; 45.068,49.451 45.068,50.051 ; 45.068,49.451 45.198,49.451 45.198,50.051 45.068,50.051 ; 59.822,47.751 59.692,47.751 59.692,48.351 59.822,48.351 ; 59.822,47.751 59.822,48.351 ; 59.822,49.451 59.692,49.451 59.692,50.051 59.822,50.051 ; 59.822,49.451 59.822,50.051 ; 65.068,47.751 65.198,47.751 65.198,48.351 65.068,48.351 ; 65.068,47.751 65.068,48.351 ; 65.068,49.451 65.068,50.051 ; 65.068,49.451 65.198,49.451 65.198,50.051 65.068,50.051 ; -2.055,29.351 ccw(c-0.055,29.351) -0.055,27.351 24.695,27.351 ccw(c24.695,29.351) 26.695,29.351 26.695,33.551 cw(c27.695,33.551) 27.695,34.551 57.195,34.551 cw(c57.195,33.551) 58.195,33.551 58.195,29.351 ccw(c60.195,29.351) 60.195,27.351 84.945,27.351 ccw(c84.945,29.351) 86.945,29.351 86.945,48.851 ccw(c84.945,48.851) 84.945,50.851 -0.055,50.851 ccw(c-0.055,48.851) -2.055,48.851 -2.055,29.351
Mechanical 13:
  lines w0.013: 17.979,-3.19 18.14,15.311 18.94,15.311 19.101,-3.19 ; 37.091,5.41 37.186,16.31 37.894,16.31 37.989,5.41 ; 65.979,-3.19 66.14,15.311 66.94,15.311 67.101,-3.19 ; 41.69,19.638 41.94,19.638 ; 41.69,19.638 41.69,19.639 ; 41.689,19.639 41.69,19.639 ; 41.689,19.639 41.689,20.239 ; 41.689,20.239 41.69,20.239 ; 41.69,20.239 41.69,20.24 41.94,20.24 41.94,20.239 ; 41.94,19.639 43.14,19.639 ; 41.94,19.638 41.94,19.639 ; 41.94,20.239 43.14,20.239 ; 41.94,20.239 41.962,20.691 cw(c42.012,20.689) 42.012,20.739 43.067,20.739 cw(c43.067,20.689) 43.117,20.691 43.14,20.239 ; 42.63,19.639 42.98,19.639 ; 42.63,19.639 42.63,19.639 ; 42.63,19.639 42.98,19.639 ; 42.98,19.639 42.98,19.639 ; 43.14,19.638 43.14,19.639 ; 43.14,19.638 43.391,19.638 43.391,20.24 43.14,20.24 43.14,20.239 ; -1.96,-1.19 ccw(c0.04,-1.19) 0.04,-3.19 24.79,-3.19 ccw(c24.79,-1.19) 26.79,-1.19 26.79,4.91 cw(c27.29,4.91) 27.29,5.41 57.79,5.41 cw(c57.79,4.91) 58.29,4.91 58.29,-1.19 ccw(c60.29,-1.19) 60.29,-3.19 85.04,-3.19 ccw(c85.04,-1.19) 87.04,-1.19 87.04,21.81 ccw(c85.04,21.81) 85.04,23.81 57.04,23.81 ccw(c57.04,21.81) 55.04,21.81 55.04,21.31 cw(c54.04,21.31) 54.04,20.31 31.04,20.31 cw(c31.04,21.31) 30.04,21.31 30.04,21.81 ccw(c28.04,21.81) 28.04,23.81 0.04,23.81 ccw(c0.04,21.81) -1.96,21.81 -1.96,-1.19 ; 38.44,19.256 39.89,19.256 39.89,20.056 38.44,20.056 38.44,19.256 ; 39.99,17.136 40.89,17.136 40.89,18.406 39.99,18.406 39.99,17.136 ; 44.19,17.136 45.09,17.136 45.09,18.406 44.19,18.406 44.19,17.136 ; 45.19,19.256 46.64,19.256 46.64,20.056 45.19,20.056 45.19,19.256